# EAGLE board Feather10DOF (EAGLE 7.5.0)
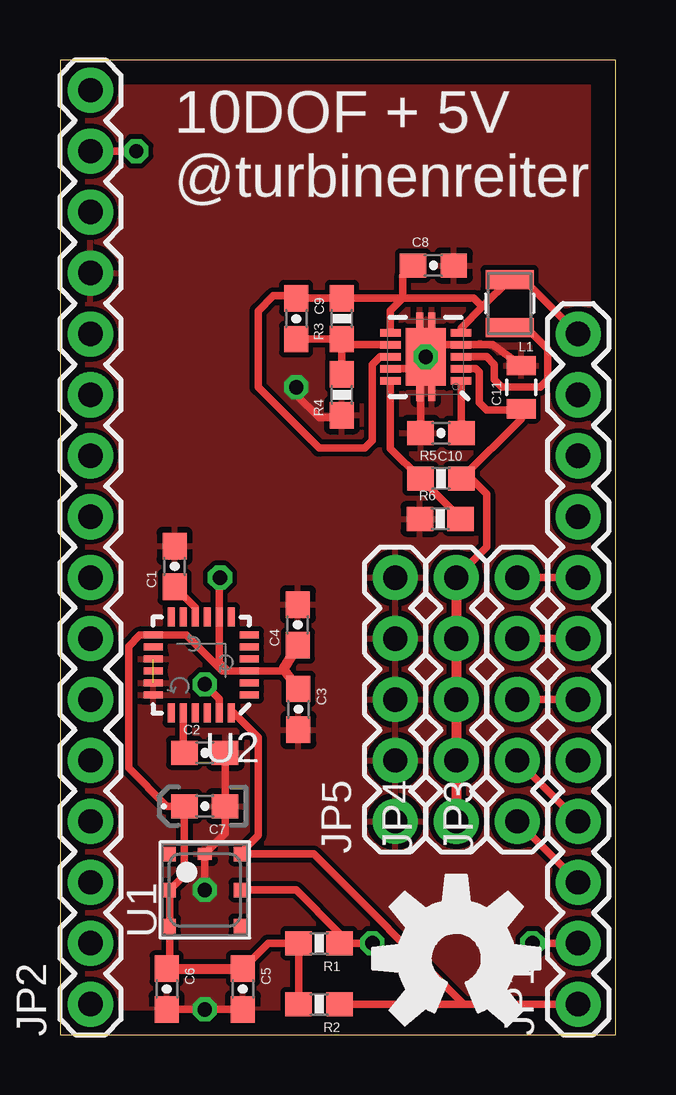
[diagram p0: board, top side]
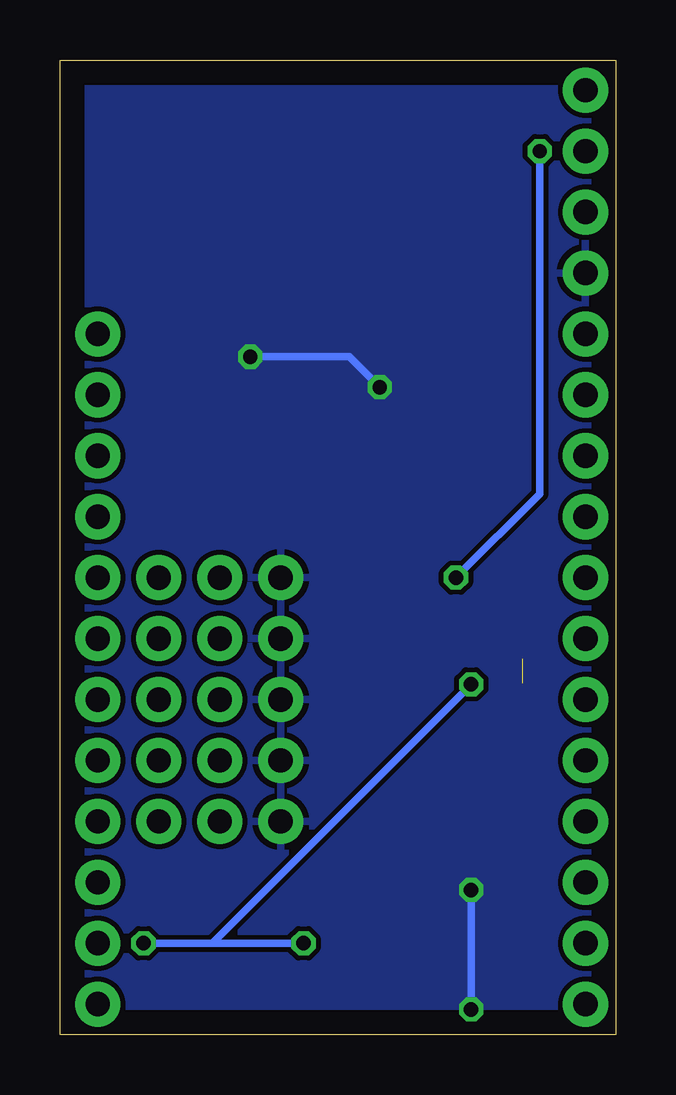
[diagram p1: board, bottom side, seen from below]

Size 23.16 x 40.63 mm. Coordinates in mm from the lower left corner, seen from the top.
Outline: 0,0 23.16,0 23.16,40.63 0,40.63 0,0
Copper layers (1*16): Top 0.035mm / dielectric 1.5mm / Bottom 0.035mm
Design rules "default": minimum track width 10mil, minimum drill 24mil, track to track 8mil, track to pad 8mil, pad to pad 8mil, via to via 8mil, smd to smd 8mil, copper to edge 40mil, drill to drill 8mil, minimum pad ring 10mil, minimum via ring 8mil, stop-mask expansion 4mil, vias tented up to drill 0mil, thermal gap 10mil

## Footprints (pad centres in the part's own frame; a part is rotated, then mirrored left to right if it is on the bottom)
0603-CAP = smd 1.1 x 1: 1 -0.85,0; 2 0.85,0
0603-POL = smd 1.1 x 1: A 0.85,0; K -0.85,0
0805 = smd 0.8 x 1.2: 1 -0.9,0; 2 0.9,0
1X12 = drill 1.016 pad 1.88: 1 0,0; 2 2.54,0; 3 5.08,0; 4 7.62,0; 5 10.16,0; 6 12.7,0; 7 15.24,0; 8 17.78,0; 9 20.32,0; 10 22.86,0; 11 25.4,0; 12 27.94,0
1X16 = drill 1.016 pad 1.88: 1 0,0; 2 2.54,0; 3 5.08,0; 4 7.62,0; 5 10.16,0; 6 12.7,0; 7 15.24,0; 8 17.78,0; 9 20.32,0; 10 22.86,0; 11 25.4,0; 12 27.94,0; 13 30.48,0; 14 33.02,0; 15 35.56,0; 16 38.1,0
1X05 = drill 1.016 pad 1.88: 1 0,0; 2 2.54,0; 3 5.08,0; 4 7.62,0; 5 10.16,0
1007 = smd 2 x 0.8: 1 0,1; 2 0,-1
0603-RES = smd 1.1 x 1: 1 -0.85,0; 2 0.85,0
BMP180 = smd 0.6 x 0.5: 1 1.5,1.45; 2 0,1.45; 3 -1.5,1.45; 4 -1.5,-1.45; 5 0,-1.45; 6 1.5,-1.45 | smd 0.5 x 0.6: 7 1.5,0
QFN-24-NP = smd 0.8 x 0.3: 1 -2,1.25; 2 -2,0.75; 3 -2,0.25; 4 -2,-0.25; 5 -2,-0.75; 6 -2,-1.25; 13 2,-1.25; 14 2,-0.75; 15 2,-0.25; 16 2,0.25; 17 2,0.75; 18 2,1.25 | smd 0.3 x 0.8: 7 -1.25,-2; 8 -0.75,-2; 9 -0.25,-2; 10 0.25,-2; 11 0.75,-2; 12 1.25,-2; 19 1.25,2; 20 0.75,2; 21 0.25,2; 22 -0.25,2; 23 -0.75,2; 24 -1.25,2
QFN-10_PAD = smd 0.297 x 0.85: 1 -1,-1.475; 2 -0.5,-1.475; 3 0,-1.475; 4 0.5,-1.475; 5 1,-1.475; 6 1,1.475; 7 0.5,1.475; 8 0,1.475; 9 -0.5,1.475; 10 -1,1.475 | smd 0.7 x 0.28: 11 -1.5,0.25; 12 -1.5,-0.25; 13 1.5,0.25; 14 1.5,-0.25 | smd 2.4 x 1.65: 15 0,0

## Placement (x,y rotation side)
C1  0.1uF  [0603-CAP]  4.78,19.52 90 top
C2  2.2nF  [0603-CAP]  6.03,11.75 0 top
C3  0.1uF  [0603-CAP]  9.94,13.56 270 top
C4  10nF  [0603-CAP]  9.91,17.08 90 top
C5  0.1uF  [0603-CAP]  7.62,1.91 270 top
C6  0.1uF  [0603-CAP]  4.45,1.91 270 top
C7  10uF  [0603-POL]  6.03,9.53 180 top
C8  10uF  [0603-CAP]  15.56,32.07 0 top
C9  0.1uF  [0603-CAP]  9.84,29.84 270 top
C10  0.1uF  [0603-CAP]  15.88,25.08 180 top
C11  22uF  [0805]  19.22,26.99 90 top
FRAME1  FRAME-LEDGER  [CREATIVE_COMMONS]  -13.65,-11.11 0 top  (outside the outline)
JP1  [1X12]  21.59,1.27 90 top
JP2  [1X16]  1.27,1.27 90 top
JP3  [1X05]  19.05,8.89 90 top
JP4  [1X05]  16.51,8.89 90 top
JP5  [1X05]  13.97,8.89 90 top
L1  [1007]  18.73,30.48 180 top
LOGO1  OSHW-LOGOL  [OSHW-LOGO-L]  16.51,3.18 0 top
R1  4.7K  [0603-RES]  10.79,3.81 180 top
R2  4.7K  [0603-RES]  10.79,1.27 180 top
R3  2.0M  [0603-RES]  11.75,29.84 90 top
R4  220k  [0603-RES]  11.75,26.67 90 top
R5  2.0M  [0603-RES]  15.88,23.18 0 top
R6  220k  [0603-RES]  15.85,21.5 0 top
U1  BMP180  [BMP180]  6.03,6.03 90 top
U2  [QFN-24-NP]  5.88,15.41 180 top
U3  TPS61200  [QFN-10_PAD]  15.24,28.26 90 top

## Library data of the parts
C1 C3 C5 C6 C9 C10 = SparkFun-Capacitors; PROD_ID: CAP-00810
C2 = SparkFun-Capacitors; PROD_ID: CAP-07877
C4 = SparkFun-Capacitors; PROD_ID: CAP-00867
C7 = SparkFun-Capacitors; PROD_ID: CAP-13210
C8 = SparkFun-Capacitors; PROD_ID: CAP-11015
C11 = SparkFun-Capacitors; PROD_ID: CAP-08402
FRAME1 LOGO1 = SparkFun-Aesthetics
JP1-JP5 = SparkFun-Connectors
L1 = SparkFun-Passives
R1 R2 = SparkFun-Resistors; PROD_ID: RES-07857
R3 R5 = SparkFun-Resistors; PROD_ID: RES-10054
R4 R6 = SparkFun-Resistors; PROD_ID: RES-08969
U1 U2 = SparkFun-Sensors
U3 = SparkFun-PowerIC; PROD_ID: IC-10035

## Nets
3V3: C3.1 C4.1 C5.1 C6.1 C7.A JP2.15 R1.2 R2.2 U1.2 U1.3 U2.3 U2.8 U2.13
5V: C11.1 JP4.1 JP4.2 JP4.3 JP4.4 JP4.5 R5.2 U3.2
BAT: C8.1 C9.1 JP1.12 L1.2 R3.2 U3.5 U3.6 U3.8
GND: C1.2 C2.2 C3.2 C4.2 C5.2 C6.2 C7.K C8.2 C10.2 C11.2 JP2.13 JP5.1 JP5.2 JP5.3 JP5.4 JP5.5 R4.1 R6.1 U1.7 U2.15 U2.17 U2.18 U3.4 U3.9 U3.11 U3.12 U3.13 U3.14 U3.15
N$1: C2.1 U2.20
N$2: C1.1 U2.10
N$4: R5.1 R6.2 U3.10
N$5: C9.2 R3.1 R4.2 U3.7
N$8: L1.1 U3.3
N$10: C10.1 U3.1
SCL: JP1.2 R1.1 U1.5 U2.23
SDA: JP1.1 R2.1 U1.6 U2.24
SRV1: JP1.3 JP3.1
SRV2: JP1.4 JP3.2
SRV3: JP1.6 JP3.3
SRV4: JP1.7 JP3.4
SRV5: JP1.8 JP3.5

## Tracks (layer width: path | path; a pad name or v marks a point on that pad's centre or on a via)
3V3  (via drill 0.6)
  Top 0.305: R2.2 R1.2 8.68,3.81 C5.1 | C6.1 4.58,2.89 U1.3 U1.2 5.18,6.63 C7.A 4.45,9.53 2.86,11.11 2.86,16.19 3.32,16.66 U2.13 5.26,16.66 6.75,15.17 6.99,15.17 | 6.99,15.17 U2.3 9.23,15.16 9.31,15.24 | 6.99,15.17 6.63,15.52 U2.8 6.63,19.02 v6.67,19.05 6.67,18.73 | JP2.15 v3.17,36.83
  Top 0.406: C4.1 9.31,15.24 C3.1 | C6.1 C5.1
  Bottom 0.305: v3.17,36.83 3.17,22.54 v6.67,19.05
5V
  Top 0.305: U3.2 17.33,27.76 17.46,27.62 17.46,26.35 17.78,26.03 19.16,26.03 C11.1 19.22,25.67 R5.2 17.14,23.18 17.78,22.54 17.78,20.32 JP4.5
  Top 0.406: JP4.5 JP4.4 JP4.3 JP4.2 JP4.1
BAT
  Top 0.305: U3.5 16.71,29.46 17.6,30.34 | 17.6,30.34 L1.2 19.32,31.48 JP1.12 | 14.29,30.7 R3.2 C9.1 9.74,30.8 8.89,30.8 8.26,30.16 8.26,26.99 10.79,24.45 12.7,24.45 13.02,24.77 13.02,27.94 13.34,28.26 U3.8 | 14.29,30.7 17.25,30.7 17.6,30.34 | U3.6 13.77,30.17 14.29,30.7 | 14.29,30.7 14.29,31.65 C8.1
GND  (via drill 0.6)  (1 unrouted)
  Top 0.305: C6.2 v6.03,1.05 C5.2 | v6.03,6.03 U1.7 6.88,8.38 C7.K C2.2 | C11.2 18.03,28.76 U3.4 15.74,28.76 | C10.2 15.03,27.62 | 15.03,27.62 15.03,28.04 U3.15 | U3.9 14.74,27.76 U3.15 | 15.74,28.76 U3.15 | U3.13 14.99,28.51 U3.15 | 15.74,28.76 15.49,29.01 U3.14 15.49,28.51 U3.15 | U3.11 14.99,27.59 15.03,27.62 | U3.12 15.49,27.16 15.03,27.62 | v9.84,26.99 9.84,26.67 10.79,25.72 11.64,25.72 R4.1
  Bottom 0.305: v6.03,6.03 v6.03,1.05 | U3.15 11.11,28.26 v9.84,26.99
  other vias: 15.24,28.26
  pour Top: 0,0 22.86,0 22.86,40.64 0,40.64
  pour Bottom: -0.32,-0.32 23.18,-0.32 23.18,40.64 -0.32,40.64
N$1
  Top 0.305: U2.20 5.13,11.8 C2.1
N$2
  Top 0.305: U2.10 5.63,17.81 C1.1
N$4
  Top 0.305: R6.2 R5.1 13.77,24.44 U3.10
N$5
  Top 0.305: U3.7 11.98,28.76 R3.1 | R3.1 R4.2 | R3.1 C9.2
N$8
  Top 0.305: U3.3 17.78,28.26 18.1,27.94 18.1,27.3 18.41,26.99 20,26.99 20.32,27.3 20.32,28.58 19.37,29.53 18.78,29.53 L1.1
N$10
  Top 0.305: U3.1 16.71,25.09 C10.1
SCL  (via drill 0.6)
  Top 0.305: JP1.2 v19.68,3.81 | v13.02,3.81 R1.1 11.64,4.23 9.84,6.03 U1.5 | U2.23 6.63,14.01 v6.03,14.6
  Bottom 0.305: v19.68,3.81 16.83,3.81 | 16.83,3.81 v13.02,3.81 | v6.03,14.6 16.83,3.81
SDA
  Top 0.305: 16.83,1.27 10.56,7.53 U1.6 8.26,8.3 8.26,12.38 7.23,13.41 U2.24 | 16.83,1.27 JP1.1 | 16.83,1.27 R2.1
SRV1
  Top 0.305: JP3.1 JP1.3
SRV2
  Top 0.305: JP1.4 JP3.2
SRV3
  Top 0.305: JP3.3 JP1.6
SRV4
  Top 0.305: JP1.7 JP3.4
SRV5
  Top 0.305: JP3.5 JP1.8

## Text on the board
tNames: 10DOF + 5V / @turbinenreiter | Sebastian Plamauer